# EAGLE board Drumpad Captouch (EAGLE 9.6.2)
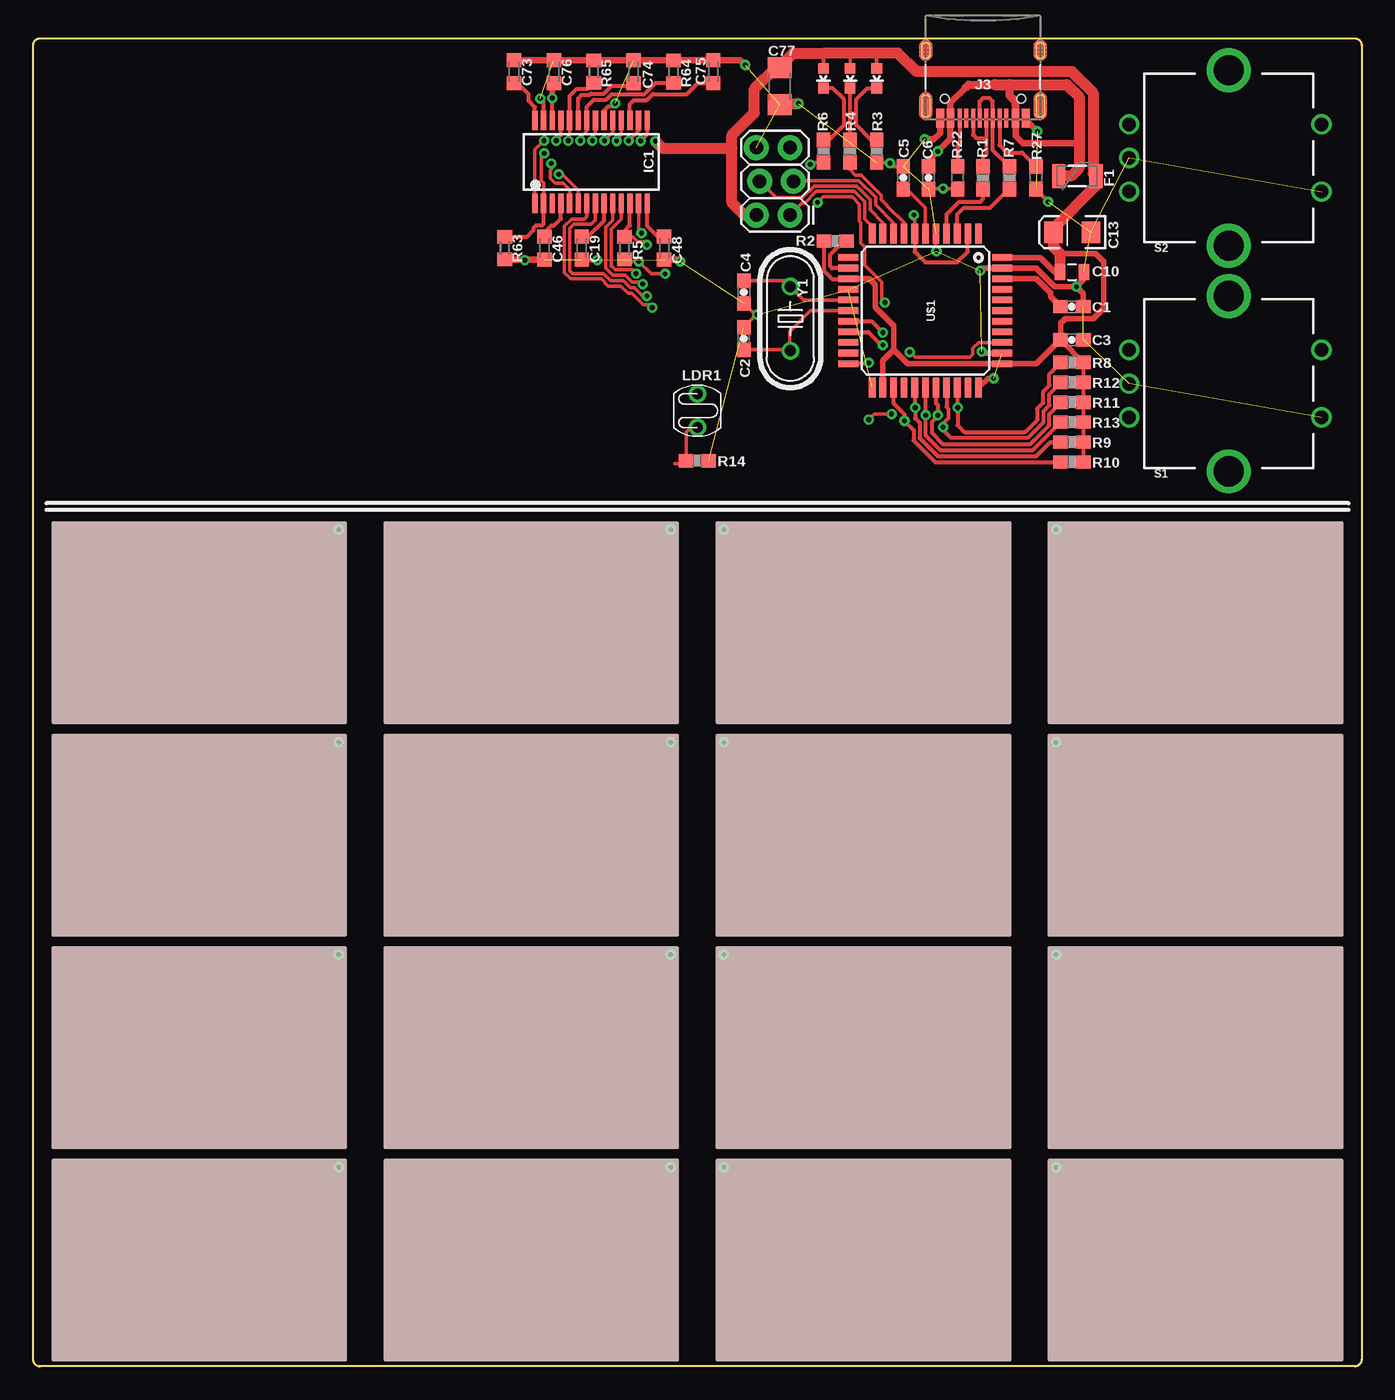
[diagram p0: board, top side]
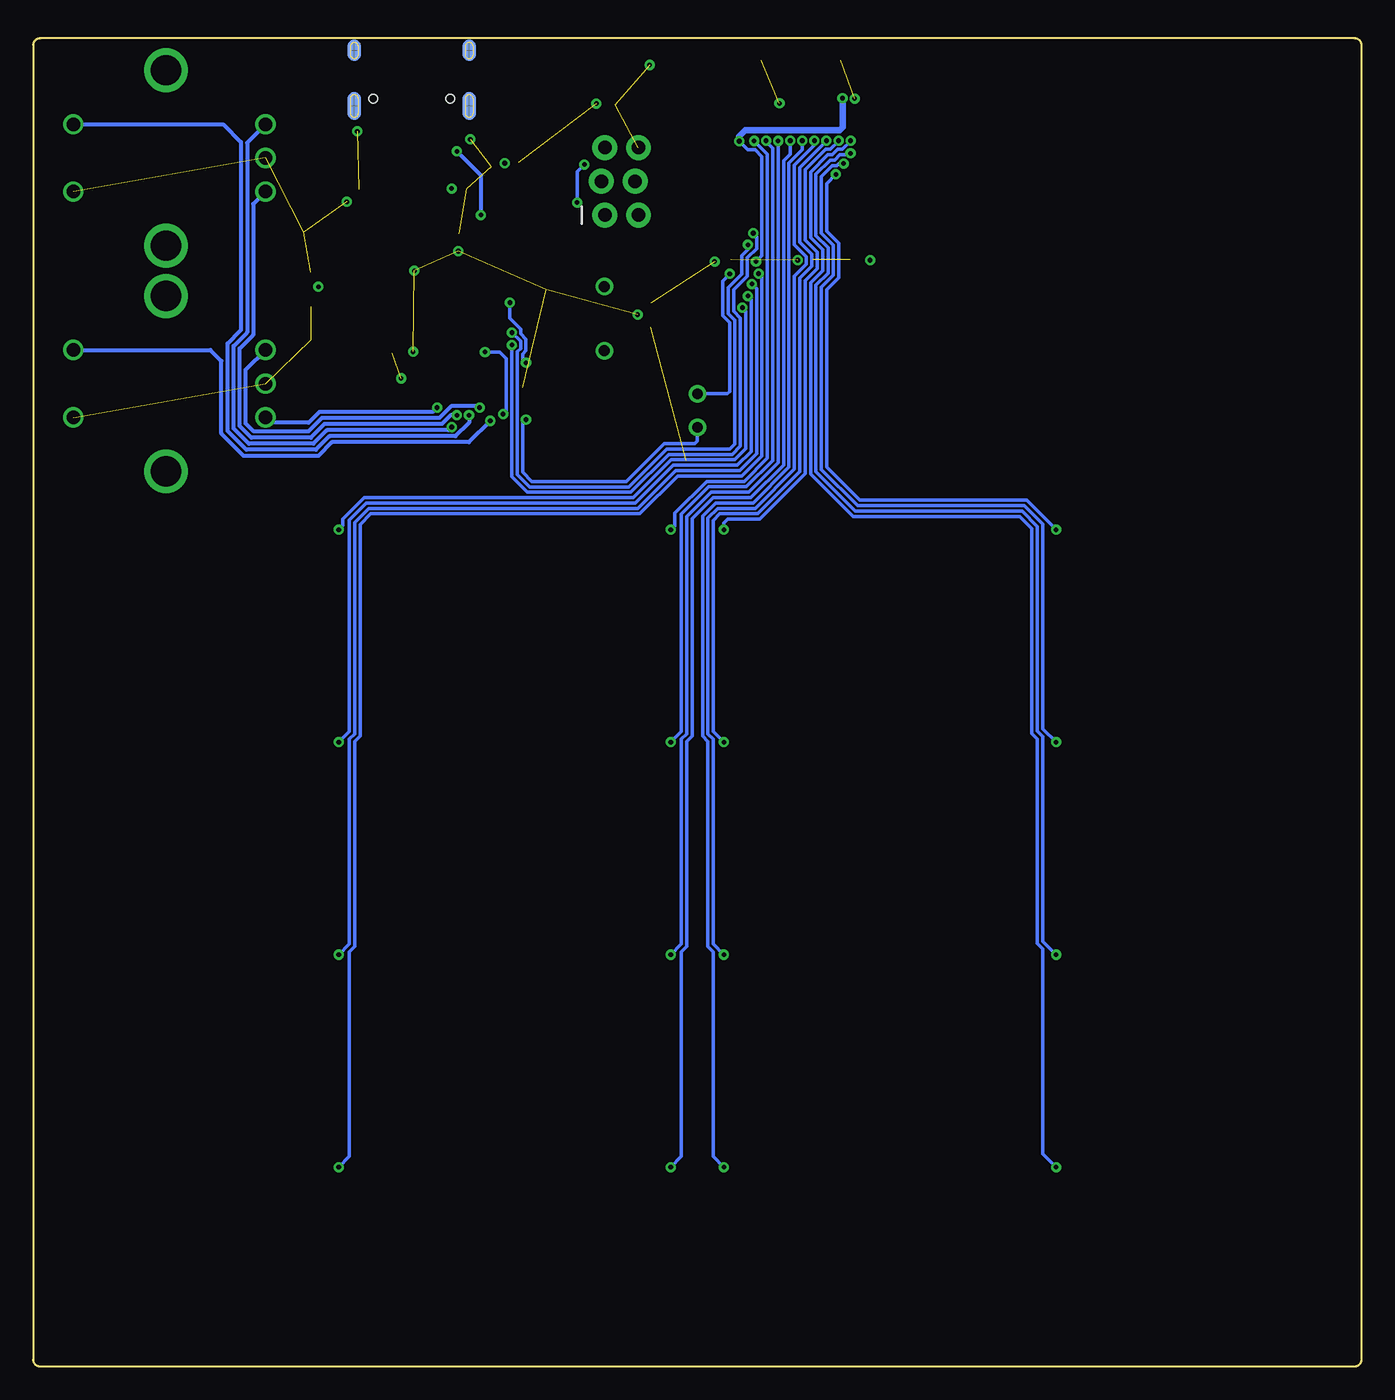
[diagram p1: board, bottom side, seen from below]

Size 100 x 100 mm. Coordinates in mm from the lower left corner, seen from the top.
Outline: 100,99.5 100,0.5 arc-90 99.5,0 0.5,0 arc-90 0,0.5 0,99.5 arc-90 0.5,100 99.5,100 arc-90 100,99.5
Copper layers (1*16): Top 0.035mm / dielectric 1.5mm / Bottom 0.035mm
Design rules "default *": minimum track width 6mil, minimum drill 0.35mm, track to track 6mil, track to pad 6mil, pad to pad 6mil, via to via 6mil, smd to smd 6mil, copper to edge 10mil, drill to drill 6mil, minimum pad ring 10mil, minimum via ring 8mil, stop-mask expansion 4mil, vias tented up to drill 0mil, thermal gap 10mil
Net classes: 0 default: width 0.152 mm, drill 0.305 mm, clearance 0.152 mm; 1 vcc: width 0.152 mm, drill 0.305 mm, clearance 0.152 mm

## Footprints (pad centres in the part's own frame; a part is rotated, then mirrored left to right if it is on the bottom)
0603-CAP = smd 1.1 x 1: 1 -0.85,0; 2 0.85,0
0805 = smd 0.8 x 1.2: 1 -0.9,0; 2 0.9,0
EIA3216 = smd 1.4 x 1.6: A 1.4,0; C -1.4,0
C0603K = smd 1.05 x 1.08: 1 -0.875,0; 2 0.875,0
C1206 = smd 1.6 x 1.8: 1 -1.4,0; 2 1.4,0
LED-0603 = smd 0.8 x 0.8: A 0,-0.75; C 0,0.75
PTC-1206 = smd 1 x 1.8: 1 -1.4,0; 2 1.4,0
TTP229-SSOP28 = smd 0.4 x 1.5: 1 -4.225,-3.125; 2 -3.575,-3.125; 3 -2.925,-3.125; 4 -2.275,-3.125; 5 -1.625,-3.125; 6 -0.975,-3.125; 7 -0.325,-3.125; 8 0.325,-3.125; 9 0.975,-3.125; 10 1.625,-3.125; 11 2.275,-3.125; 12 2.925,-3.125; 13 3.575,-3.125; 14 4.225,-3.125; 15 4.225,3.125; 16 3.575,3.125; 17 2.925,3.125; 18 2.275,3.125; 19 1.625,3.125; 20 0.975,3.125; 21 0.325,3.125; 22 -0.325,3.125; 23 -0.975,3.125; 24 -1.625,3.125; 25 -2.275,3.125; 26 -2.925,3.125; 27 -3.575,3.125; 28 -4.225,3.125
2X3_LOCK = drill 1.016 pad 1.88: 1 0,0.127; 2 0,2.667; 3 2.54,-0.127; 4 2.54,2.413; 5 5.08,0.127; 6 5.08,2.667
USB-C-16P = smd 0.3 x 1.45: A5 -1.25,0; A6 -0.25,0; A7 0.25,0; A8 1.25,0; B5 1.75,0; B6 0.75,0; B7 -0.75,0; B8 -1.75,0 | smd 0.6 x 1.45: GND -3.225,0; GND2 3.225,0 | smd 1 x 2.1: SHLD1 -4.32,-0.915; SHLD2 4.32,-0.915 | smd 1 x 2.1 bottom: SHLD3 -4.32,-0.915; SHLD4 4.32,-0.915 | smd 1 x 1.6: SHLD5 -4.32,-5.095; SHLD8 4.32,-5.095 | smd 1 x 1.6 bottom: SHLD6 -4.32,-5.095; SHLD7 4.32,-5.095 | smd 0.55 x 1.45: VBUS1 -2.45,0; VBUS2 2.45,0 | hole 0.65: -2.89,-1.445; 2.89,-1.445
LDR3MM = drill 0.8: P$1 0,0; P$2 2.54,0
0603-RES = smd 1.1 x 1: 1 -0.85,0; 2 0.85,0
R0603 = smd 1 x 1.1: 1 -0.85,0; 2 0.85,0
0603@1 = smd 1.1 x 1: 1 -0.85,0; 2 0.85,0
ROTARY_ENC_PLAIN = drill 1.016: A 7.493,-2.54; B 7.493,2.54; C 7.493,0; SW+ -6.985,2.54; SW- -6.985,-2.54 | drill 2.286: P$3 0,6.604; P$4 0,-6.604
TQFP44 = smd 1.5 x 0.5: 1 -5.8,4; 2 -5.8,3.2; 3 -5.8,2.4; 4 -5.8,1.6; 5 -5.8,0.8; 6 -5.8,0; 7 -5.8,-0.8; 8 -5.8,-1.6; 9 -5.8,-2.4; 10 -5.8,-3.2; 11 -5.8,-4; 23 5.8,-4; 24 5.8,-3.2; 25 5.8,-2.4; 26 5.8,-1.6; 27 5.8,-0.8; 28 5.8,0; 29 5.8,0.8; 30 5.8,1.6; 31 5.8,2.4; 32 5.8,3.2; 33 5.8,4 | smd 0.5 x 1.5: 12 -4,-5.8; 13 -3.2,-5.8; 14 -2.4,-5.8; 15 -1.6,-5.8; 16 -0.8,-5.8; 17 0,-5.8; 18 0.8,-5.8; 19 1.6,-5.8; 20 2.4,-5.8; 21 3.2,-5.8; 22 4,-5.8; 34 4,5.8; 35 3.2,5.8; 36 2.4,5.8; 37 1.6,5.8; 38 0.8,5.8; 39 0,5.8; 40 -0.8,5.8; 41 -1.6,5.8; 42 -2.4,5.8; 43 -3.2,5.8; 44 -4,5.8
HC49U-V = drill 0.813: 1 -2.413,0; 2 2.413,0

## Placement (x,y rotation side)
C1  0.1uF  [0603-CAP]  78.2,79.8 180 top
C2  22pF  [0603-CAP]  53.5,77.4 90 top
C3  0.1uF  [0603-CAP]  78.2,77.3 180 top
C4  22pF  [0603-CAP]  53.5,80.9 270 top
C5  1uF  [0603-CAP]  65.5,89.5 270 top
C6  1uF  [0603-CAP]  67.4,89.5 90 top
C10  1uF  [0805]  78.2,82.4 0 top
C13  10uF  [EIA3216]  78.22,85.4 180 top
C19  30pF  [C0603K]  41.3,84.2 90 top
C46  30pF  [C0603K]  38.5,84.2 90 top
C48  30pF  [C0603K]  47.5,84.2 90 top
C73  30pF  [C0603K]  36.2,97.5 270 top
C74  30pF  [C0603K]  45.2,97.5 270 top
C75  30pF  [C0603K]  51.2,97.5 270 top
C76  104  [C0603K]  39.2,97.5 270 top
C77  106  [C1206]  56.2,96.4 90 top
D1  Yellow  [LED-0603]  61.5,97 180 top
D3  Green  [LED-0603]  59.5,97 180 top
F1  500mA  [PTC-1206]  78.6,89.64 0 top
IC1  TTP229  [TTP229-SSOP28]  42,90.7 0 top
J1  AVR_SPI_PROG_3X22X3_LOCK  [2X3_LOCK]  57.1,86.7 90 top
J3  USB-C-Socket  [USB-C-16P]  71.5,94 180 top
LDR1  CDSLDR3MM  [LDR3MM]  50,70.7 90 top
LED1  Red  [LED-0603]  63.5,97 180 top
R1  22  [0603-RES]  71.5,89.5 90 top
R2  10K  [0603-RES]  60.38,84.74 180 top
R3  330  [0603-RES]  63.5,91.5 270 top
R4  330  [0603-RES]  61.5,91.5 90 top
R5  10k  [R0603]  44.5,84.2 90 top
R6  330  [0603-RES]  59.5,91.5 90 top
R7  22  [0603-RES]  73.5,89.5 90 top
R8  10K  [0603-RES]  78.2,75.6 0 top
R9  10K  [0603-RES]  78.2,69.6 0 top
R10  10K  [0603-RES]  78.2,68.1 0 top
R11  10K  [0603-RES]  78.2,72.6 0 top
R12  10K  [0603-RES]  78.2,74.1 0 top
R13  10K  [0603-RES]  78.2,71.1 0 top
R14  1K\  [0603-RES]  50,68.2 0 top
R22  5.1k  [0603@1]  69.6,89.5 90 top
R27  5.1k  [0603@1]  75.5,89.5 90 top
R63  1M  [R0603]  35.5,84.2 270 top
R64  1M  [R0603]  48.2,97.5 90 top
R65  1M  [R0603]  42.2,97.5 90 top
S1  ENCODER-SWITCH  [ROTARY_ENC_PLAIN]  90,74 180 top
S2  ENCODER-SWITCH  [ROTARY_ENC_PLAIN]  90,91 180 top
U$1  32U4  [TQFP44]  67.16,79.5 270 top
Y1  16MHz  [HC49U-V]  57,78.9 270 top

## Library data of the parts
C1-C6 C10 C13 D1 D3 F1 LED1 R1-R4 R6-R14 Y1 = SparkFun
C19 C46 C48 C73-C77 = rcl; SPICEPREFIX: C
IC1 = ttp229
J1 = SparkFun-Connectors
J3 = SparkFun-Connectors; PROD_ID: CONN-14122
LDR1 = CEDTv40
R5 = adafruit
R22 R27 = SparkFun-Resistors; PROD_ID: RES-12083
R63-R65 = rcl; SPICEPREFIX: R
S1 S2 = SparkFun-Switches; SF_SKU: COM-09117
U$1 = SparkFun-IC-Microcontroller; PROD_ID: IC-11161

## Nets
A0: LDR1.P$1 R14.1 U$1.36
A1: U$1.37
A2: U$1.38
A3: U$1.39
A4: U$1.40
A5: U$1.41
AREF: C1.2 U$1.42
CC1: J3.A5 R27.2
CC2: J3.B5 R22.2
D2_TTP_SCL: IC1.13 U$1.19
D3_TTP_SDO: IC1.12 R5.2 U$1.18
D4: R10.1 S1.SW- U$1.25
D5: R8.1 S1.B U$1.31
D6: R9.1 S1.A U$1.27
D7: U$1.1
D8: R13.1 S2.SW- U$1.28
D9: R11.1 S2.B U$1.29
D10: R12.1 S2.A U$1.30
D11: U$1.12
D12: U$1.26
D13: U$1.32
D14: R4.1 U$1.8
D+: R1.1 U$1.4
D-: R7.1 U$1.3
GND: C1.1 C2.2 C3.1 C4.2 C5.1 C6.1 C10.2 C13.C C19.1 C46.1 C48.1 C73.1 C74.1 C75.1 C76.1 C77.1 IC1.20 IC1.27 J1.6 J3.GND J3.GND2 R3.2 R14.2 R22.1 R27.1 R63.2 R64.2 R65.2 S1.C S1.SW+ S2.C S2.SW+ U$1.5 U$1.15 U$1.23 U$1.33 U$1.35 U$1.43
MISO: J1.1 U$1.11
MOSI: J1.4 U$1.10
N$6: LED1.C R3.1
N$33: C4.1 U$1.16 Y1.1
N$57: C2.1 U$1.17 Y1.2
N$71: C5.2 U$1.6
N$73: J3.A7 J3.B7 R7.2
N$74: J3.A6 J3.B6 R1.2
N$75: D1.C R4.2
N$76: D3.C R6.2
RESET: R2.1 U$1.13
RST: J1.5
RXI: U$1.20
SCK: J1.3 U$1.9
SHLD: J3.SHLD1 J3.SHLD2 J3.SHLD3 J3.SHLD4 J3.SHLD5 J3.SHLD6 J3.SHLD7 J3.SHLD8
TOUCH2_K0: IC1.6
TOUCH2_K1: IC1.5
TOUCH2_K2: IC1.2 R63.1
TOUCH2_K3: IC1.1
TOUCH2_K4: IC1.25
TOUCH2_K5: IC1.24 R65.1
TOUCH2_K6: IC1.22 R64.1
TOUCH2_K7: IC1.21
TOUCH2_K8: IC1.19
TOUCH2_K9: IC1.18
TOUCH2_K10: IC1.16
TOUCH2_K11: IC1.15
TOUCH2_K12: IC1.11
TOUCH2_K13: IC1.10
TOUCH2_K14: IC1.8
TOUCH2_K15: IC1.7
TOUCH2_SENADJ0: C46.2 IC1.4
TOUCH2_SENADJ1: C74.2 IC1.23
TOUCH2_SENADJ2: C75.2 IC1.17
TOUCH2_SENADJ3: C19.2 IC1.9
TOUCH2_SLPSENA: C73.2 IC1.28
TOUCH2_SLPSENB: C48.2 IC1.14
TXLED: R6.1 U$1.22
TXO: U$1.21
UVCC: C6.2 F1.1 J3.VBUS1 J3.VBUS2 U$1.2 U$1.7
VCC: C3.2 C10.1 C13.A C76.2 C77.2 D1.A D3.A F1.2 IC1.26 J1.2 LDR1.P$2 LED1.A R2.2 R5.1 R8.2 R9.2 R10.2 R11.2 R12.2 R13.2 U$1.14 U$1.24 U$1.34 U$1.44

## Tracks (layer width: path | path; a pad name or v marks a point on that pad's centre or on a via)
A0  (via drill 0.35)
  Top 0.254: U$1.36 71.17,77.1 70.74,76.67 70.74,76.22 70.5,75.98 66.39,75.98 v65.99,76.39 | v64.62,71.71 63.31,71.71 v62.9,71.3 | LDR1.P$1 49.5,70.7 49.15,70.35 R14.1 48.93,67.98 48.28,67.98
  Bottom 0.254: v65.99,76.39 64.86,76.39 64.37,75.9 64.37,71.96 v64.62,71.71 | v62.9,71.3 63.15,71.05 63.15,67.33 62.46,66.64 55.34,66.64 52.49,69.49 50.2,69.49 50,69.69 LDR1.P$1
AREF
  Top 0.406: C1.2 76.6,80.55 76.6,80.81 75.51,81.9 U$1.42
CC1
  Top 0.305: J3.A5 72.75,91.95 73.3,91.4 74.45,91.4 R27.2
CC2
  Top 0.305: J3.B5 69.75,92.05 69.6,91.9 R22.2
D2_TTP_SCL  (via drill 0.35)
  Top 0.254: v45.79,85.34 45.58,85.56 IC1.13
  Top 0.305: U$1.19 62.88,77.9 63.86,76.92 v63.97,76.92
  Bottom 0.254: v45.79,85.34 45.54,85.09 45.54,84.17 46.25,83.47 46.25,82.08 47.27,81.06 47.27,79.45 46.76,78.95 46.76,69.3 47.39,68.68 52.15,68.68 55,65.83 62.8,65.83 63.97,66.99 v63.97,76.92
D3_TTP_SDO  (via drill 0.35)
  Top 0.254: v46.2,84.46 45.98,84.68 45.52,84.68 45.15,85.05 R5.2
  Top 0.305: R5.2 44.5,85.5 44.92,85.92 IC1.12 | U$1.18 63.12,78.7 v63.97,77.85
  Bottom 0.254: v63.97,77.85 63.31,77.19 63.31,76.65 63.56,76.4 63.56,67.16 62.63,66.23 55.17,66.23 52.32,69.08 47.55,69.08 47.17,69.47 47.17,78.78 47.67,79.28 47.67,81.23 46.65,82.25 46.65,83.64 46.2,84.09 v46.2,84.46
D4  (via drill 0.35)
  Top 0.305: U$1.25 64.76,72.54 65.59,71.71 v65.59,71.2 66.28,70.51 66.28,69.72 67.91,68.09 77.34,68.09 R10.1 77.35,68.12
  Bottom 0.305: S1.SW- 86.67,76.54 85.83,75.7 85.83,70.24 84.15,68.56 78.54,68.56 77.51,69.59 67.2,69.59 v65.59,71.2
D5  (via drill 0.35)
  Top 0.305: U$1.31 69.56,72.24 v69.6,72.2 69.6,70.87 70.1,70.37 74.68,70.37 75.58,71.27 75.58,72.11 76.04,72.56 76.04,73.42 76.5,73.87 76.5,74.73 77.35,75.58 R8.1
  Bottom 0.305: v69.6,72.2 69.93,71.87 78.46,71.87 79.27,71.07 82.11,71.07 S1.B
D6  (via drill 0.35)
  Top 0.305: U$1.27 66.36,72.24 v66.4,72.2 66.4,71.4 66.73,71.07 66.73,69.92 68.11,68.54 75.49,68.54 76.55,69.6 R9.1
  Bottom 0.305: S1.A 84,75.05 84,71 83.39,70.39 79.29,70.39 78.27,71.42 69.42,71.42 68.53,72.3 66.5,72.3 v66.4,72.2
D8  (via drill 0.35)
  Top 0.305: U$1.28 67.16,71.65 v67.19,71.62 67.19,70.11 68.3,69 75.25,69 R13.1
  Bottom 0.305: S2.SW- 85.7,93.54 84.36,92.2 84.36,78.04 85.37,77.02 85.37,70.43 83.96,69.02 78.72,69.02 77.7,70.04 68.21,70.04 67.19,71.06 v67.19,71.62
D9  (via drill 0.35)
  Top 0.305: U$1.29 67.96,72.54 68.1,72.4 v68.1,71.62 67.87,71.39 67.87,71.33 67.65,71.11 67.65,70.3 68.49,69.46 75.06,69.46 76.5,70.89 76.5,71.73 77.35,72.58 R11.1
  Bottom 0.305: S2.B 83.44,87.52 83.44,77.66 84.46,76.64 84.46,70.81 83.58,69.94 79.1,69.94 78.08,70.96 69.23,70.96 68.57,71.62 v68.1,71.62
D10  (via drill 0.35)
  Top 0.305: U$1.30 68.76,72.24 68.9,72.1 68.9,71.4 68.5,71 v68.5,70.73 68.5,70.52 69.1,69.91 74.87,69.91 76.04,71.08 76.04,71.92 76.5,72.37 76.5,73.23 77.35,74.08 R12.1
  Bottom 0.305: S2.A 83.9,92.15 83.9,77.85 84.91,76.83 84.91,70.62 83.77,69.48 78.91,69.48 77.89,70.5 68.72,70.5 v68.5,70.73
D14
  Top 0.254: U$1.8 65.57,86.12 64.35,87.35 64.3,87.39 63.83,87.87 63.83,88.2 63.11,88.91 63.01,89.01 62.33,89.7 61.9,89.7 61.5,90.1 R4.1
D+
  Top 0.305: U$1.4 68.76,86.76 69.7,87.7 71.3,87.7 71.5,87.9 R1.1
D-
  Top 0.305: 73.5,88.52 R7.1 73.45,88.65 72.04,87.24 70.04,87.24 69.56,86.76 U$1.3
  Top 0.406: 73.4,88.42 73.5,88.52
GND  (via drill 0.35)  (26 unrouted)
  Top 0.254: U$1.5 67.96,84.02 v68,83.98 | C2.2 54.45,79.2 | 54.45,79.2 v54.5,79.2 | C4.2 54.35,79.2 54.45,79.2 | R3.2 64.45,90.65 v64.5,90.6 64.75,90.35 C5.1 | C6.1 67.45,88.7 v68.5,88.7 69.55,88.7 R22.1
  Top 0.305: v76.4,87.7 75.5,88.6 R27.1 | R3.2 63.65,90.65 | 42.98,94.59 IC1.20 42.98,94.56 43.3,94.88 43.59,94.88 v43.82,95.11 | IC1.27 38.42,95.21 v38.17,95.47 | C19.1 41.33,83.3 v42.45,83.3
  Top 0.406: C10.2 79.1,81.87 v78.53,81.3 | U$1.35 71.5,76.3 v71.4,76.4 | U$1.33 71.86,74.4 v72.3,74.4 | v78.53,81.3 76.9,81.3 75.5,82.7 U$1.43 71.5,82.7 v71.3,82.5 | C1.1 79.05,80.78 v78.53,81.3
  Top 0.508: J3.GND2 68.28,92.88 67.8,92.4 v67.1,92.4 | J3.GND 74.72,93.88 v75.6,93 | C46.1 37.02,83.33 v37,83.3 36.95,83.35 R63.2 | C48.1 48.58,83.33 v48.7,83.2 | C73.1 C76.1 42.17,98.38 R65.2 45.17,98.35 C74.1 48.17,98.38 R64.2 48.23,98.38 C75.1 53.23,98.38 v53.6,98
  Top 0.813: C77.1 56.3,95.1 v57.6,95.1
MISO
  Top 0.254: 57.56,87.29 J1.1 57.87,87.59 58.07,87.59 58.96,88.48 61.82,88.48 62.61,87.69 62.61,86.39 62.83,86.17 63,86 63.16,85.84 U$1.11
MOSI
  Top 0.254: J1.4 55.93,88 57.9,88 58.79,88.89 61.99,88.89 63.01,87.86 63.01,87.09 63.96,86.14 U$1.10
N$6
  Top 0.305: R3.1 63.1,92.35 61.96,93.49 61.96,95.41 62.8,96.25 LED1.C
N$33
  Top 0.254: C4.1 56.56,81.75 Y1.1 58.01,80.3 U$1.16
N$57
  Top 0.254: C2.1 56.94,76.55 | 56.94,76.55 Y1.2 | U$1.17 58.5,79.5 56.94,77.94 56.94,76.55
N$71
  Top 0.254: C5.2 65.75,88.65 67.16,87.24 U$1.6
N$73
  Top 0.305: R7.2 72.25,91.6 J3.B7 72.25,95.25 72,95.5 71.5,95.5 71.25,95.25 J3.A7
N$74
  Top 0.305: J3.A6 71.75,92.5 | 71.75,92.5 71.75,91.25 71.5,91 R1.2 | J3.B6 70.75,92.75 71,92.5 71.75,92.5
N$75
  Top 0.305: R4.2 D1.C
N$76
  Top 0.305: R6.2 59.9,92.35 61.04,93.49 61.04,95.41 60.2,96.25 D3.C
RESET
  Top 0.305: U$1.13 60.15,82.7 59.99,82.86 59.99,83.72 61.01,84.74 R2.1
SCK
  Top 0.254: J1.3 57.26,89.24 57.31,89.29 62.16,89.29 63.42,88.03 63.42,87.48 64.76,86.14 U$1.9
TOUCH2_K0  (via drill 0.35)
  Top 0.254: v39.57,89.77 39.83,89.77 41.02,88.58 IC1.6
  Bottom 0.254: v39.57,89.77 40.26,89.07 40.26,85.49 39.35,84.58 39.35,82 40.26,81.09 40.26,67.71 37.77,65.22 25.22,65.22 v23,63
  pour Top: 23.5,48.5 1.5,48.5 1.5,63.5 23.5,63.5
TOUCH2_K1  (via drill 0.35)
  Top 0.254: IC1.5 40.38,88.62 39.89,89.11 39.29,89.11 38.91,89.49 38.91,90.04 38.99,90.12 v38.99,90.58
  Bottom 0.254: v38.99,90.58 39.35,90.58 39.51,90.42 39.84,90.42 40.67,89.6 40.67,85.32 39.76,84.41 39.76,82.17 40.67,81.26 40.67,67.54 37.94,64.81 25.39,64.81 24,63.42 24,48 v23,47
  pour Top: 1.5,47.5 1.5,32.5 23.5,32.5 23.5,47.5
TOUCH2_K2  (via drill 0.35)
  Top 0.254: IC1.2 38.42,89.12 38.24,89.31 38.24,91.11 v38.47,91.34
  Top 0.305: IC1.2 38.42,86.03 38.3,85.91 37.83,85.91 37.66,85.73 37.66,85.56 37.15,85.05 R63.1
  Bottom 0.254: v38.47,91.34 38.58,91.24 39.27,91.24 39.67,90.83 40.01,90.83 41.07,89.76 41.07,85.16 40.16,84.25 40.16,82.34 41.07,81.43 41.07,67.37 38.1,64.41 25.56,64.41 24.41,63.26 24.41,47.83 24,47.42 24,32 v23,31
  pour Top: 23.5,16.5 1.5,16.5 1.5,31.5 23.5,31.5
TOUCH2_K3  (via drill 0.35)
  Top 0.254: IC1.1 37.77,91.61 v38.47,92.3
  Bottom 0.254: v38.47,92.3 38.47,92.28 39.1,91.64 39.44,91.64 39.84,91.24 40.18,91.24 41.48,89.93 41.48,84.99 40.57,84.08 40.57,82.5 41.48,81.6 41.48,67.21 38.27,64 25.72,64 24.81,63.09 24.81,47.66 24.41,47.26 24.41,31.83 24,31.43 24,16 v23,15
  pour Top: 23.5,0.5 1.5,0.5 1.5,15.5 23.5,15.5
TOUCH2_K4  (via drill 0.35)
  Top 0.254: IC1.25 39.73,92.67 39.62,92.57 39.62,92.55 v39.37,92.3
  Bottom 0.254: v39.37,92.3 39.37,92.28 40.01,91.64 40.34,91.64 41.89,90.1 41.89,84.82 40.98,83.91 40.98,82.67 41.89,81.77 41.89,67.21 45.3,63.8 47.7,63.8 48,63.5 v48,63
  pour Top: 26.5,63.5 26.5,48.5 48.5,48.5 48.5,63.5
TOUCH2_K5  (via drill 0.35)
  Top 0.254: IC1.24 40.38,92.39 v40.28,92.3
  Top 0.305: R65.1 42.15,96.65 41.7,96.2 40.9,96.2 40.38,95.67 IC1.24
  Bottom 0.254: v40.28,92.3 40.28,92.28 42.29,90.27 42.29,84.65 41.38,83.74 41.38,82.84 42.29,81.93 42.29,67.38 45.47,64.21 48.3,64.21 48.8,63.7 48.8,47.8 v48,47
  pour Top: 26.5,47.5 26.5,32.5 48.5,32.5 48.5,47.5
TOUCH2_K6  (via drill 0.35)
  Top 0.254: IC1.22 41.67,93 41.19,92.52 v41.19,92.3
  Top 0.305: IC1.22 41.67,94.86 42.2,95.39 43.13,95.39 43.54,95.8 45.99,95.8 46.85,96.65 R64.1
  Bottom 0.254: v41.19,92.3 41.19,91.94 42.7,90.44 42.7,84.48 41.79,83.57 41.79,83.01 42.7,82.1 42.7,67.55 45.64,64.61 48.47,64.61 49.21,63.87 49.21,47.63 48.8,47.23 48.8,31.8 v48,31
  pour Top: 26.5,31.5 26.5,16.5 48.5,16.5 48.5,31.5
TOUCH2_K7  (via drill 0.35)
  Top 0.254: IC1.21 42.33,92.83 42.1,92.6 v42.1,92.3
  Bottom 0.254: v42.1,92.3 42.1,91.61 43.1,90.61 43.1,67.72 45.8,65.02 48.63,65.02 49.61,64.04 49.61,47.46 49.21,47.06 49.21,31.63 48.8,31.23 48.8,15.8 v48,15
  pour Top: 26.5,15.5 26.5,0.5 48.5,0.5 48.5,15.5
TOUCH2_K8  (via drill 0.35)
  Top 0.254: IC1.19 43.62,92.92 v43.01,92.31 v43.01,92.3
  Bottom 0.254: v43.01,92.3 43.01,91.28 43.51,90.77 43.51,67.89 45.97,65.43 48.8,65.43 50.39,63.84 50.39,47.46 50.79,47.06 50.79,31.63 51.2,31.23 51.2,15.8 v52,15
  pour Top: 73.5,0.5 51.5,0.5 51.5,15.5 73.5,15.5
TOUCH2_K9  (via drill 0.35)
  Top 0.254: IC1.18 44.27,92.78 43.92,92.42 v43.92,92.28
  Bottom 0.254: v43.92,92.28 43.92,68.06 46.14,65.83 48.97,65.83 50.79,64.01 50.79,47.63 51.2,47.23 51.2,31.8 v52,31
  pour Top: 73.5,16.5 51.5,16.5 51.5,31.5 73.5,31.5
TOUCH2_K10  (via drill 0.35)
  Top 0.254: IC1.16 45.58,93.05 v44.83,92.3
  Bottom 0.254: v44.83,92.3 44.83,92.23 44.32,91.72 44.32,68.22 46.31,66.24 49.14,66.24 51.2,64.18 51.2,47.8 v52,47
  pour Top: 73.5,32.5 51.5,32.5 51.5,47.5 73.5,47.5
TOUCH2_K11  (via drill 0.35)
  Top 0.254: IC1.15 46.23,92.77 v45.73,92.28
  Bottom 0.254: v45.73,92.28 44.73,91.27 44.73,68.39 46.48,66.64 49.31,66.64 51.71,64.25 51.71,63.29 v52,63
  pour Top: 73.5,48.5 51.5,48.5 51.5,63.5 73.5,63.5
TOUCH2_K12  (via drill 0.35)
  Top 0.254: IC1.11 44.27,86.38 43.94,86.05 43.93,86.05 43.51,85.63 43.51,82.89 | 43.51,82.89 43.51,82.86 | v45.39,82.29 45.11,82.57 43.83,82.57 43.51,82.89
  Bottom 0.254: v45.39,82.29 45.14,82.04 45.14,68.56 46.65,67.05 51.48,67.05 54.33,64.2 74.58,64.2 75.39,63.39 75.39,47.46 75.79,47.06 75.79,31.63 76.2,31.23 76.2,15.8 v77,15
  pour Top: 98.5,0.5 76.5,0.5 76.5,15.5 98.5,15.5
TOUCH2_K13  (via drill 0.35)
  Top 0.254: IC1.10 43.62,86.31 43.1,85.79 43.1,82.69 43.63,82.16 44.59,82.16 45.12,81.63 45.77,81.63 v45.89,81.51
  Bottom 0.254: v45.89,81.51 45.54,81.16 45.54,68.73 46.81,67.46 51.65,67.46 54.5,64.61 74.74,64.61 75.79,63.56 75.79,47.63 76.2,47.23 76.2,31.8 v77,31
  pour Top: 98.5,16.5 76.5,16.5 76.5,31.5 98.5,31.5
TOUCH2_K14  (via drill 0.35)
  Top 0.254: IC1.8 42.33,86.33 42,86 40.7,86 40.4,85.7 40.4,82.53 40.62,82.3 42.92,82.3 43.46,81.76 44.42,81.76 44.95,81.23 45.24,81.23 45.87,80.6 v46.2,80.6
  Bottom 0.254: v46.2,80.6 45.95,80.35 45.95,68.9 46.99,67.86 51.81,67.86 54.66,65.01 74.91,65.01 76.2,63.73 76.2,47.8 v77,47
  pour Top: 98.5,32.5 76.5,32.5 76.5,47.5 98.5,47.5
TOUCH2_K15  (via drill 0.35)
  Top 0.254: IC1.7 41.67,86.58 41.5,86.41 40.53,86.41 39.99,85.87 39.99,82.36 40.46,81.89 42.75,81.89 43.3,81.35 44.25,81.35 44.78,80.82 45.05,80.82 45.93,79.94 46.39,79.94 v46.61,79.72
  Bottom 0.254: v46.61,79.72 46.36,79.47 46.36,69.1 47.19,68.27 51.98,68.27 54.83,65.42 75.08,65.42 76.7,63.8 76.7,63.3 v77,63
  pour Top: 98.5,48.5 76.5,48.5 76.5,63.5 98.5,63.5
TOUCH2_SENADJ0
  Top 0.305: C46.2 38.5,85.4 39,85.9 39.2,85.9 39.73,86.42 IC1.4
TOUCH2_SENADJ1
  Top 0.305: C74.2 45.03,96.46 43.56,96.46 42.95,95.84 41.99,95.84 41.89,95.74 41.3,95.74 41.02,95.47 IC1.23
TOUCH2_SENADJ2
  Top 0.305: IC1.17 44.92,95.06 45.2,95.34 46.19,95.34 46.65,95.8 49.2,95.8 50.02,96.62 C75.2
TOUCH2_SENADJ3
  Top 0.305: C19.2 41.3,85.1 41.8,85.1 42.98,86.28 IC1.9
TOUCH2_SLPSENA
  Top 0.305: IC1.28 37.77,94.83 37.3,95.3 37.3,95.8 36.48,96.62 C73.2
TOUCH2_SLPSENB
  Top 0.305: C48.2 47.02,85.08 46.23,85.88 IC1.14
TXLED  (via drill 0.35)
  Top 0.254: v62.9,75.58 62.82,75.5 U$1.22 | v64.11,80.1 63.86,80.35 63.86,81.66 62.6,82.92 62.6,84.3 62.3,84.6 62.3,86.12 62.2,86.22 62.2,87.53 61.65,88.07 59.48,88.07 v59.05,87.65 | v58.5,90.5 58.65,90.65 R6.1
  Bottom 0.254: v62.9,75.58 63.15,75.83 63.15,76.23 62.9,76.48 62.9,77.36 63.31,77.77 63.31,78.12 64.11,78.93 v64.11,80.1 | v59.05,87.65 59.05,89.95 v58.5,90.5
UVCC  (via drill 0.35)
  Top 0.254: U$1.7 66.36,86.64 v66.3,86.7
  Top 0.305: U$1.7 66.36,83.94 67.16,83.14 69.54,83.14 70.36,83.96 U$1.2
  Top 0.508: C6.2 67.4,90.8 v68.1,91.5 69.05,92.45 J3.VBUS2 69.05,95.15 70.2,96.3 | 73.95,94.95 J3.VBUS1 73.95,92.65 74.5,92.1 78.64,92.1 78.73,92.2
  Top 0.61: 70.2,96.3 70.42,96.52 72.38,96.52 | 73.95,94.95 73.95,95.25 73.5,95.7 73.5,96.52
  Top 0.813: 72.38,96.52 73.5,96.52 77.81,96.52 78.73,95.6 78.73,92.2 78.73,90.23 78.14,89.64 F1.1
  Bottom 0.305: v68.1,91.5 66.3,89.7 v66.3,86.7
VCC  (via drill 0.35)
  Top 0.254: R5.1 44.65,83.2 v45.59,83.2 46.52,82.27 v47.56,82.27 | D1.A 61.5,98.8
  Top 0.305: IC1.26 v39.08,95.5 | D3.A 59.5,98.8 59.6,98.9 | 61.5,98.8 61.6,98.9 | LED1.A 63.5,98.8 63.4,98.9 | R2.2 59.53,82.51 60.16,81.88 61.34,81.88 U$1.14 | 79.05,75.3 R12.2 R11.2 R13.2 R9.2 R10.2
  Top 0.406: U$1.24 63.96,75.74 64.78,76.56 | U$1.14 62.94,81.9 63.38,81.46 63.38,79.78 64.78,78.38 64.78,76.56 | 64.78,76.56 65.84,75.5 U$1.34 75.5,75.5 77.3,77.3 C3.2 | 77.3,82.6 C10.1 76.9,82.4 75.8,83.5 U$1.44 | v39.08,95.5 39.08,96.5 C76.2 | C3.2 R8.2 79.05,75.3 | C3.2 77.35,78.55 77.7,78.9 79.8,78.9 80.6,79.7 80.6,83.2 80,83.8 77.3,83.8
  Top 0.813: J1.2 53.53,86.7 52.6,87.63 52.6,91.7 | 52.6,91.7 52.6,92.7 54.3,94.4 54.3,96.2 55.9,97.8 C77.2 56.2,97.9 57.2,98.9 59.6,98.9 61.6,98.9 63.4,98.9 65.1,98.9 66.5,97.5 78.2,97.5 79.8,95.9 79.8,89.84 F1.2 80,88.9 76.82,85.72 C13.A 76.82,84.28 77.3,83.8 C10.1 | v46.84,92.26 47.4,91.7 52.6,91.7
  Bottom 0.254: v45.59,83.2 45.14,83.65 45.14,91.11 45.65,91.62 46.21,91.62 v46.84,92.26 | LDR1.P$2 47.73,73.24 47.58,73.4 47.58,78.61 48.08,79.11 48.08,80.68 48.1,80.7 48.1,81.73 v47.56,82.27
  Bottom 0.508: v46.84,92.26 46.84,92.66 46.4,93.1 39.3,93.1 39.08,93.33 v39.08,95.5

## Text on the board
tPlace: Barbot faces